# EAGLE board Cool Leelo-Trug (EAGLE 9.7.0)

Size 418.04 x 223.7 mm. Coordinates in mm from the lower left corner, seen from the top.
Outline: 0,0 418.04,0 418.04,223.7 0,223.7 0,0
Copper layers (1*16): Top 0.035mm / dielectric 1.5mm / Bottom 0.035mm
Design rules "default": minimum track width 6mil, minimum drill 0.35mm, track to track 6mil, track to pad 6mil, pad to pad 6mil, via to via 6mil, smd to smd 6mil, copper to edge 40mil, drill to drill 6mil, minimum pad ring 10mil, minimum via ring 8mil, stop-mask expansion 4mil, vias tented up to drill 0mil, thermal gap 10mil

## Footprints (pad centres in the part's own frame; a part is rotated, then mirrored left to right if it is on the bottom)
LEDRD254W60D565H860B_Y = drill 0.981 pad 1.581: 1 -1.27,0; 2 1.27,0
LEDRD254W60D565H860B_G = drill 0.981 pad 1.581: 1 -1.27,0; 2 1.27,0
LEDRD254W60D565H860B = drill 0.981 pad 1.581: 1 -1.27,0; 2 1.27,0
MQ-XX-SOCKET = drill 1.27: 1 -6.223,6.223; 2 -8.788,0; 3 -6.223,-6.223; 4 6.223,-6.223; 5 8.788,0; 6 6.223,6.223
BATTERY-GENERIC = drill 1.118 pad 3.15 octagon: + 2.54,0; - -2.54,0
RESAD1016W63L850D250B = drill 0.83 pad 1.43: 1 -5.08,0; 2 5.08,0
1X02 = drill 1.016 long: 1 -1.27,0; 2 1.27,0
ARDUINO-UNO-R3-SHIELD = drill 1.016 pad 1.88: 3.3V 24.13,-2.54; 5V 24.13,0; A0 24.13,12.7; A1 24.13,15.24; A2 24.13,17.78; A3 24.13,20.32; A4 24.13,22.86; A5 24.13,25.4; AREF -24.13,-13.97; D2 -24.13,20.32; D3 -24.13,17.78; D4 -24.13,15.24; D5 -24.13,12.7; D6 -24.13,10.16; D7 -24.13,7.62; D8 -24.13,3.81; D9 -24.13,1.27; D10 -24.13,-1.27; D11 -24.13,-3.81; D12 -24.13,-6.35; D13 -24.13,-8.89; GND@0 24.13,2.54; GND@1 24.13,5.08; GND@2 -24.13,-11.43; IOREF 24.13,-7.62; NC 24.13,-10.16; RES 24.13,-5.08; RX -24.13,25.4; SCL -24.13,-19.05; SDA -24.13,-16.51; TX -24.13,22.86; VIN 24.13,7.62
LCD-I2C = drill 1.016 long: 1 -19.05,-5.08; 2 -19.05,-7.62; 3 -19.05,-10.16; 4 -19.05,-12.7
DIP762W53P254L1969H508Q14B = drill 0.743 pad 1.343: 1 -3.81,7.62; 2 -3.81,5.08; 3 -3.81,2.54; 4 -3.81,0; 5 -3.81,-2.54; 6 -3.81,-5.08; 7 -3.81,-7.62; 8 3.81,-7.62; 9 3.81,-5.08; 10 3.81,-2.54; 11 3.81,0; 12 3.81,2.54; 13 3.81,5.08; 14 3.81,7.62
7SEG-X4-I2C = drill 1.016 long: P$1 -3.81,0; P$2 -1.27,0; P$3 1.27,0; P$4 3.81,0
LEDRD254W51D580H541B = drill 0.921 pad 1.521: A -1.27,0; C 1.27,0
TO92 = drill 0.813 octagon: 1 -1.27,0; 2 0,1.905; 3 1.27,0

## Placement (x,y rotation side)
D1  YELLOW  [LEDRD254W60D565H860B_Y]  314.17,202.03 180 top
D2  YELLOW  [LEDRD254W60D565H860B_Y]  321.79,204.57 180 top
D3  GREEN  [LEDRD254W60D565H860B_G]  306.55,199.49 180 top
D4  RED  [LEDRD254W60D565H860B]  329.41,207.11 180 top
D5  RED  [LEDRD254W60D565H860B]  337.03,209.65 180 top
DISPO2_L  RED  [LEDRD254W60D565H860B]  135.01,47.13 180 top
DPPG_L  RED  [LEDRD254W60D565H860B]  95.24,43.68 180 top
GASCO2  GAS-SENSORMQ-XX-SOCKET  [MQ-XX-SOCKET]  403.82,201.92 270 top
P1  BATTERYGENERIC  [BATTERY-GENERIC]  275.83,188.34 180 top
R1  1k  [RESAD1016W63L850D250B]  93.93,35.75 90 top
R2  1k  [RESAD1016W63L850D250B]  133.74,39.05 90 top
R3  220  [RESAD1016W63L850D250B]  340.84,204.57 0 top
R4  220  [RESAD1016W63L850D250B]  328.14,196.95 90 top
R5  220  [RESAD1016W63L850D250B]  305.28,214.73 90 top
R6  1k  [RESAD1016W63L850D250B]  162.82,27.64 0 top
R7  220  [RESAD1016W63L850D250B]  312.9,194.41 90 top
R8  220  [RESAD1016W63L850D250B]  320.52,196.95 90 top
R9  3k  [RESAD1016W63L850D250B]  356.08,202.03 0 top
R10  4.7k  [RESAD1016W63L850D250B]  376.4,179.17 90 top
R11  1k  [RESAD1016W63L850D250B]  368.78,209.65 0 top
R12  1k  [RESAD1016W63L850D250B]  373.86,196.95 90 top
R13  1k  [RESAD1016W63L850D250B]  363.7,184.25 0 top
R14  3.9k  [RESAD1016W63L850D250B]  353.54,179.17 90 top
RFLEXI  FLEX-SENSOR  [1X02]  205.97,32.21 0 top
U1  ARDUINO-UNO-R3-SHIELD  [ARDUINO-UNO-R3-SHIELD]  47.88,62.78 270 top
U2  LCD-16X2-I2CSUNFOUNDER-IIC  [LCD-I2C]  167.36,178.92 0 top
U3  LM339_PDIP  [DIP762W53P254L1969H508Q14B]  351,195.68 90 top
UDISP_ISPO2  RED  [7SEG-X4-I2C]  245.28,102.85 0 top
UISPO2_F  PHOTODIODE  [LEDRD254W51D580H541B]  123.32,41.4 180 top
ULCD  LCD-16X2-I2CSUNFOUNDER-IIC  [LCD-I2C]  52.32,179.41 0 top
UPPG_F  PHOTODIODE  [LEDRD254W51D580H541B]  105.3,43.18 180 top
UTEMP  TMP36GT9Z_TO92  [TO92]  68.66,4.83 0 top

## Library data of the parts
D1 D2 = Tinkercad; CATEGORY: Opto-Electronic; SUB-CATEGORY: LED; VALUE: LED_YELLOW
D3 = Tinkercad; CATEGORY: Opto-Electronic; SUB-CATEGORY: LED; VALUE: LED_GREEN
D4 D5 DISPO2_L DPPG_L = Tinkercad; CATEGORY: Opto-Electronic; SUB-CATEGORY: LED; VALUE: LED_RED
GASCO2 P1 R1-R14 RFLEXI U1-U3 UDISP_ISPO2 UISPO2_F ULCD UPPG_F UTEMP = Tinkercad

## Nets
D1_C: D1.2 R7.2
D2_C: D2.2 R8.2
D3_C: D3.2 R5.1
D4_C: D4.2 R4.2
D5_C: D5.2 R3.1
DISPO2_L_C: DISPO2_L.2 R2.2
DPPG_L_C: DPPG_L.2 R1.2
GASCO2_B: GASCO2.4 GASCO2.6 R10.2 U3.4 U3.6 U3.8 U3.10
P1+: D1.1 D2.1 D3.1 D4.1 D5.1 GASCO2.1 GASCO2.2 GASCO2.3 P1.+ R9.2 U3.3
P1-: GASCO2.5 P1.- R5.2 R10.1 R14.1 U3.12
U1_5V: RFLEXI.1 U1.5V U2.2 UDISP_ISPO2.P$1 ULCD.2 UTEMP.3
U1_A0: U1.A0 UTEMP.2
U1_A1: U1.A1 UPPG_F.A
U1_A2: U1.A2 UISPO2_F.A
U1_A3: R6.2 RFLEXI.2 U1.A3
U1_D9: DPPG_L.1 U1.D9
U1_D10: DISPO2_L.1 U1.D10
U1_GND: R1.1 R2.1 R6.1 U1.GND@0 U1.GND@1 U1.GND@2 U2.1 UDISP_ISPO2.P$2 UISPO2_F.C ULCD.1 UPPG_F.C UTEMP.1
U1_SCL: U1.SCL U2.4 UDISP_ISPO2.P$4 ULCD.4
U1_SDA: U1.SDA U2.3 UDISP_ISPO2.P$3 ULCD.3
U3_+IN1: R12.1 R13.1 U3.7
U3_+IN2: R13.2 R14.2 U3.5
U3_+IN3: R11.2 R12.2 U3.9
U3_+IN4: R9.1 R11.1 U3.11
U3_OUT1: R8.1 U3.1
U3_OUT2: R7.1 U3.2
U3_OUT3: R4.1 U3.14
U3_OUT4: R3.2 U3.13

## Tracks (layer width: path | path; a pad name or v marks a point on that pad's centre or on a via)
D1_C  (1 unrouted)
D2_C  (1 unrouted)
D3_C  (1 unrouted)
D4_C  (1 unrouted)
D5_C  (1 unrouted)
DISPO2_L_C  (1 unrouted)
DPPG_L_C  (1 unrouted)
GASCO2_B  (6 unrouted)
P1+  (10 unrouted)
P1-  (5 unrouted)
U1_5V  (5 unrouted)
U1_A0  (1 unrouted)
U1_A1  (1 unrouted)
U1_A2  (1 unrouted)
U1_A3  (2 unrouted)
U1_D9  (1 unrouted)
U1_D10  (1 unrouted)
U1_GND  (11 unrouted)
U1_SCL  (3 unrouted)
U1_SDA  (3 unrouted)
U3_+IN1  (2 unrouted)
U3_+IN2  (2 unrouted)
U3_+IN3  (2 unrouted)
U3_+IN4  (2 unrouted)
U3_OUT1  (1 unrouted)
U3_OUT2  (1 unrouted)
U3_OUT3  (1 unrouted)
U3_OUT4  (1 unrouted)